# Altium PCB dtb219-schematic.PcbDoc
Units mil, origin at the board's own origin, x right, y up, seen from the top; angles counter-clockwise.
Board outline 8000 x 1250 mil, 2 copper layers (Top Layer, Bottom Layer); 41 components, 14 nets, 107 pads, 1 vias.
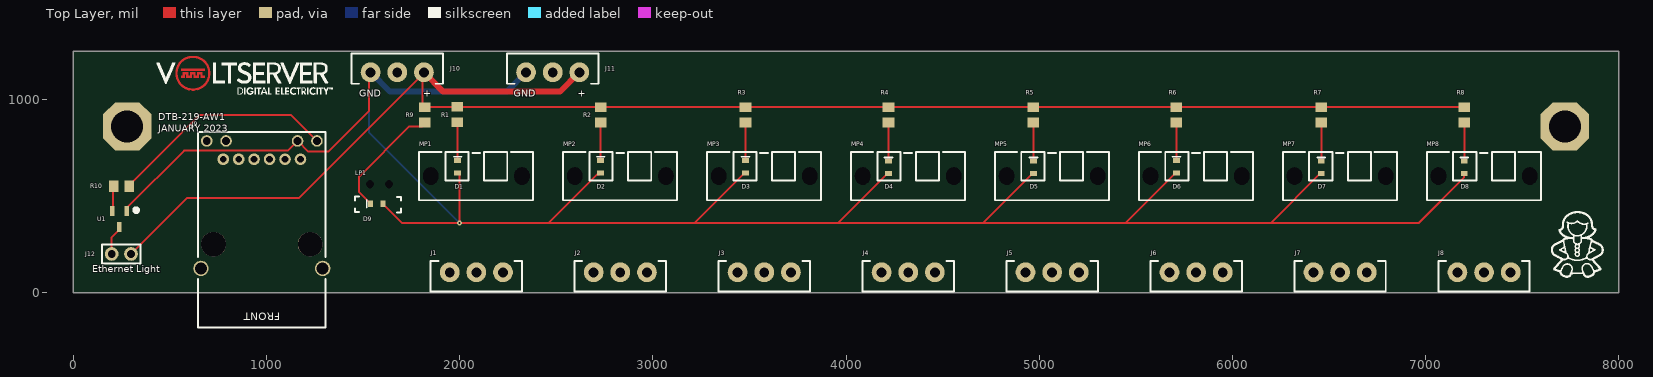
[diagram p0: Top Layer view]
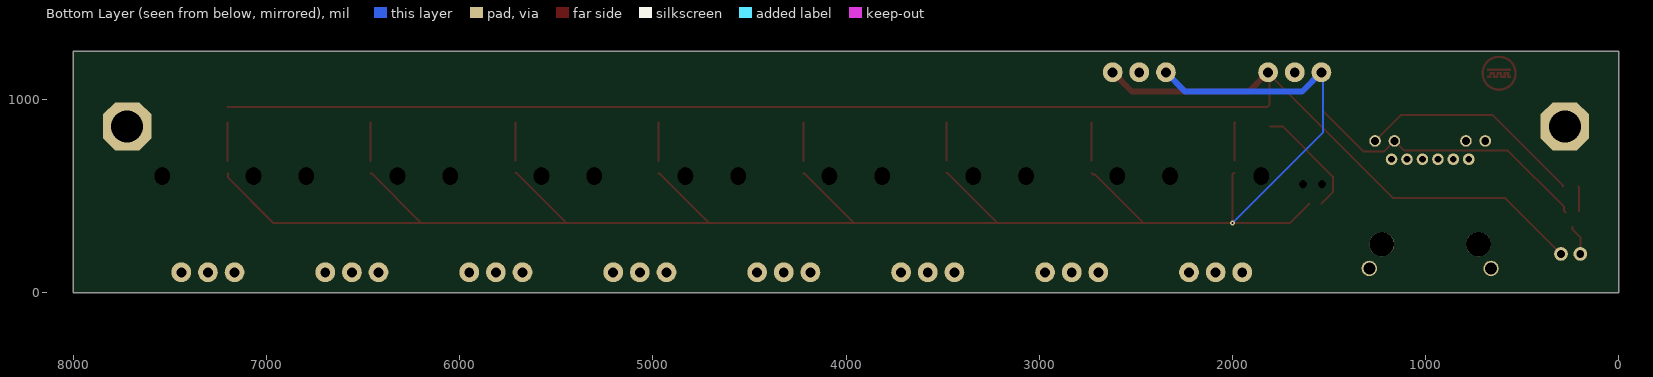
[diagram p1: Bottom Layer view, seen from below]
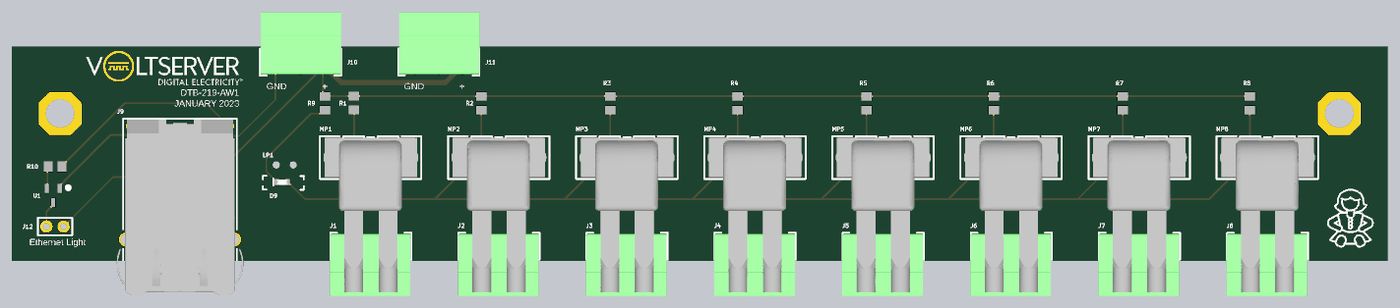
[diagram p2: 3D render of the assembled board from above, using the file's embedded part models]

## Layer stack, top to bottom
Top Solder: solder mask 0.4, Solder Resist, Dk 3.5
Top Layer: signal copper 1.4
Dielectric 1: dielectric 12.6, FR-4, Dk 4.8
Bottom Layer: signal copper 1.4
Bottom Solder: solder mask 0.4, Solder Resist, Dk 3.5

## Board outline
0,0 0,1250 8000,1250 8000,0

## Design rules (kind name [scope] priority, off if disabled: settings)
Clearance [All] p1: gap=10 ignorepadtopadclearanceinfootprint=FALSE except(0: Arc-Hole Track-Hole SMDPad-Hole THPad-Hole Via-Hole Fill-Hole Poly-Hole Region-Hole Text-Hole)
PolygonConnect [All] p1: connectstyle=Relief reliefconductorwidth=10 reliefentries=4 polygonreliefangle="90 Angle" airgapwidth=10
RoutingVias [All] p1: holewidth=10 width=25 viastyle="Through Hole" minholewidth=10 minwidth=25 maxholewidth=10 maxwidth=25
SolderMaskExpansion [All] p1: expansion=4 istentingtop=FALSE
Width [All] p1: maxlimit=30 minlimit=10 preferedwidth=10
30 further rules are at their usual default settings.

## Components (designator, comment, footprint, x,y, rotation, side; value= is the part's Value field where it differs from the comment)
D1 "Green LED Clear SMD" LTST-C19X 1990,683 r0 top value="Green LED"
D2 "Green LED Clear SMD" LTST-C19X 2730,683 r0 top value="Green LED"
D3 "Green LED Clear SMD" LTST-C19X 3480,683 r0 top value="Green LED"
D4 "Green LED Clear SMD" LTST-C19X 4220,680 r0 top value="Green LED"
D5 "Green LED Clear SMD" LTST-C19X 4970,680 r0 top value="Green LED"
D6 "Green LED Clear SMD" LTST-C19X 5710,683 r0 top value="Green LED"
D7 "Green LED Clear SMD" LTST-C19X 6460,680 r0 top value="Green LED"
D8 "Green LED Clear SMD" LTST-C19X 7200,680 r0 top value="Green LED"
D9 "Green LED Clear SMD" LTST-C19X 1540,460 r90 top value="Green LED"
J1 "1844223" 1844223 2087,105 r0 top locked
J2 "1844223" 1844223 2832,105 r0 top locked
J3 "1844223" 1844223 3577,105 r0 top locked
J4 "1844223" 1844223 4322,105 r0 top locked
J5 "1844223" 1844223 5067,105 r0 top locked
J6 "1844223" 1844223 5812,105 r0 top locked
J7 "1844223" 1844223 6557,105 r0 top locked
J8 "1844223" 1844223 7302,105 r0 top locked
J9 "08B0-1D1T-06-F" 08B0-1D1T-06-F 977,455 r180 top locked
J10 "1844223" 1844223 1677.8,1140 r180 top
J11 "1844223" 1844223 2482.2,1140 r180 top
J12 "PRPC002SAAN-RC" PRPC002SAAN-RC 200,200 r0 top
LP1 "LPF-C011302S" LPF-C011302S 1537,560 r270 top locked
MP1 "RLP2-400-800" RLP2-400-800 2087,603 r0 top locked
MP2 "RLP2-400-800" RLP2-400-800 2832,603 r0 top locked
MP3 "RLP2-400-800" RLP2-400-800 3577,603 r0 top locked
MP4 "RLP2-400-800" RLP2-400-800 4322,603 r0 top locked
MP5 "RLP2-400-800" RLP2-400-800 5067,603 r0 top locked
MP6 "RLP2-400-800" RLP2-400-800 5812,603 r0 top locked
MP7 "RLP2-400-800" RLP2-400-800 6557,603 r0 top
MP8 "RLP2-400-800" RLP2-400-800 7302,603 r0 top locked
R1 "150 OHM" "0805 Footprint" 1988,921 r270 top value="150 Ohm 5%, 1/2W"
R2 "150 OHM" "0805 Footprint" 2730,920 r270 top value="150 Ohm 5%, 1/2W"
R3 "150 OHM" "0805 Footprint" 3480,920 r270 top value="150 Ohm 5%, 1/2W"
R4 "150 OHM" "0805 Footprint" 4220,920 r270 top value="150 Ohm 5%, 1/2W"
R5 "150 OHM" "0805 Footprint" 4970,920 r270 top value="150 Ohm 5%, 1/2W"
R6 "150 OHM" "0805 Footprint" 5710,920 r270 top value="150 Ohm 5%, 1/2W"
R7 "150 OHM" "0805 Footprint" 6460,920 r270 top value="150 Ohm 5%, 1/2W"
R8 "150 OHM" "0805 Footprint" 7200,920 r270 top value="150 Ohm 5%, 1/2W"
R9 "150 OHM" "0805 Footprint" 1820,920 r270 top value="150 Ohm 5%, 1/2W"
R10 "RES SMD 110 OHM 5% 1/8w 0805" "0805 Footprint" 250,550 r0 top value="110 Ohm 5%, 1/8W"
U1 "LINEAR 2.2V 200MA" SOT23-3 277.4,422.68 r270 top

## Footprints (in the part's own frame and the unit in brackets; to place one, negate y for a bottom-side part, rotate by r counter-clockwise, add the part's x,y. Pads: shape width x height; smd on the part's side, far side on the other; paste and mask are expansions set on the pad)
08B0-1D1T-06-F [mil] "507-1441-ND"
  round 128 hole 128 unplated: 0(-250,205) 0(250,205)
  round 60 hole 35: 1(-200,-235) 2(-120,-235) 3(-40,-235) 4(40,-235) 5(120,-235) 6(200,-235)
  round 60 hole 40: 7(-285,-330) 8(-185,-330) 9(185,-330) 10(285,-330)
  round 80 hole 62: 11(-315,330) 12(315,330)
  silkscreen extent -330,-375 330,635, body extent -369,-370 369,660, height 578
"0805 Footprint" [mil]
  rect 50x60 smd: 1(-40,0) 2(40,0)
  body extent -40,-25 40,25, height 22
1844223 [mm]
  round 2.6 hole 1.3: 1(-3.5,0) 2(0,0) 3(3.5,0)
  silkscreen extent -6,-2.5 6,1.5, body extent -6.05,-7.9 5.85,1.3, height 7.25
LPF-C011302S [mil]
  round 0 hole 43 unplated: 0(0,98.43) 0(0,0)
  silkscreen extent 64,-77 145,160
LTST-C19X [mil]
  rect 35x26 smd: 1(0,0) 2(0,-63)
  silkscreen extent -20,20 20,20, body extent -16,-63 16,0, height 22
PRPC002SAAN-RC [mm]
  round 1.8 hole 1: 1(0,0) 2(2.54,0)
  silkscreen extent -1.27,-1.27 3.81,1.27
RLP2-400-800 [mil] "Light Pipe 2 Wide Clear Rigid Round with Flat Top, 2.8mm Board Mount, Snap-In, Right Angle"
  round 0 hole 79 slot 90 at 90 deg unplated: 0(-236,0) 0(236,0)
  silkscreen extent -296,-125 294,125, body extent -289,-787 289,115, height 486
SOT23-3 [mm]
  rect 1.3x0.6 smd: 1(0,0) 2(0,-1.9) 3(2.1,-0.95)
  silkscreen extent -0.35,1 0.15,1.5, body extent 0.35,-2.45 1.75,0.55, height 1.12

## Part data
D1 D2 D3 D4 D5 D6 D7 D8 D9: library part "LED Green", "Green 571nm LED Indication - Discrete 2V 0603 (1608 Metric)", Manufacturer="Lite-On Inc.", Manufacturer PN=LTST-C191KGKT, Vendor=Digikey, Vendor PN=160-1446-2-ND
J1 J2 J3 J4 J5 J6 J7 J8 J10 J11: "3 Position Terminal Block Header, Male Pins, Shrouded (4 Side) 0.138\" (3.50mm) 90°, Right Angle Through Hole", Manufacturer="Phoenix Contact", VoltServer PN=CON-00009, Manufacturer PN=1844223, Vendor=Digikey, Vendor PN=277-2415-ND
J9: "CONN MAGJACK 1PORT 100 BASE-T", Manufacturer="Bel Fuse Inc", Manufacturer PN=08B0-1D1T-06-F, Vendor=Digikey, Vendor PN=507-1441-ND
J12: "CONN HEADER .100\" SNGL STR 2POS", Manufacturer="Sullins Connector Solutions", VoltServer PN=CON-00043, Manufacturer PN=PRPC002SAAN-RC, Vendor=Digikey, Vendor PN=S1011EC-02-ND
LP1: "Light Pipe Single Clear Rigid Round with Flat Top, 3mm Board Mount, Press Fit, Right Angle", Manufacturer="Lumex Opto/Components Inc.", VoltServer PN=LPG-00002, Manufacturer PN=LPF-C011302S, Vendor=Digikey, Vendor PN=67-1846-ND
MP1 MP2 MP3 MP4 MP5 MP6 MP7 MP8: "Light Pipe 2 Wide Clear Rigid Round with Flat Top, 2.8mm Board Mount, Snap-In, Right Angle", Manufacturer=Bivar, Manufacturer PN=RLP2-400-800, Vendor=Digikey, Vendor PN=492-1448-ND
R1 R2 R3 R4 R5 R6 R7 R8 R9: library part ERJ-P06J151V, "150 Ohms ±5% 0.5W, 1/2W Chip Resistor 0805 (2012 Metric)", Manufacturer="Panasonic Electionic Components", Manufacturer PN=ERJ-P06J151V, Vendor=Digi-Key, Vendor PN=P150ADTR-ND
R10: library part ERJ-6GEYJ111V, "110 Ohms ±5% 0.125W, 1/8W Chip Resistor 0805 (2012 Metric) Automotive AEC-Q200 Thick Film", Manufacturer="Panasonic Electionic Components", Manufacturer PN=ERJ-6GEYJ111V, Vendor=Digi-Key, Vendor PN=P110ATR-ND
U1: library part TPS7A0522PDBZR, "Linear Voltage Regulator IC Positive Fixed 1 Output 200mA SOT-23-3", Manufacturer="Texas Instruments", Manufacturer PN=TPS7A0522PDBZR, Vendor=Digi-Key, Vendor PN=296-TPS7A0522PDBZRTR-ND

## Free pads (board coordinates)
  oct 250x250 hole 166: ""(280,860) ""(7720,860)

## Via types
v1: diameter 25, hole 10, Top Layer to Bottom Layer, 1 vias

## Nets (pads, with @x,y where several pads share a name; then routed paths per layer and width w, separated by ;. In a path a pad name is that pad's centre, name@x,y a point inside that pad or via, vN(x,y) a via of type N, cw(c..) or ccw(c..) an arc to the next point about the centre after c; other vN are vias at no path point)
5V: J10.1 J11.1 J12.2 R1.1 R2.1 R3.1 R4.1 R5.1 R6.1 R7.1 R8.1 R9.1 | length 8333
  Top Layer w10: J12.2 589.12,489.12 1169.12,489.12 1807.8,1127.8 1807.8,972.2 R9.1 1821,961 R1.1 7199,961 R8.1
  Top Layer w30: J10.1 1915.59,1040 2520,1040 J11.1
GND: D1.2 D2.2 D3.2 D4.2 D5.2 D6.2 D7.2 D8.2 D9.2 J9.8 J10.3 J11.3 U1.1 | length 11835
  Top Layer w10: U1.1@276.93,415.4 284.21,422.68 284.21,444.21 575,735 1112,735 J9.8 1217,730 1320,730 1532.2,942.2 J10.3@1532.2,1140 ; D9.2 1703,360 v1(2000,360) ; D1.2 1992,620 2000,612 v1(2000,360) ; D2.2 2722,612 2712,612 2460,360 ; D3.2 3475.5,620 3220,364.5 3220,360 ; D4.2 4215.5,617 3960,361.5 3960,360 ; D5.2 4965.5,617 4708.5,360 ; D6.2 5705.5,620 5445.5,360 ; D7.2 6455.5,617 6200,361.5 6200,360 ; D8.2 7197.56,614.56 7197.56,594.86 6962.71,360 6200,360 ; v1(2000,360) 2460,360 ; 2460,360 3220,360 ; 3220,360 3960,360 ; 3960,360 4708.5,360 ; 4708.5,360 5445.5,360 ; 5445.5,360 6200,360
  Bottom Layer w10: J10.3@1532.2,1140 1532.2,827.8 v1(2000,360)
  Bottom Layer w30: J10.3 1640,1040 2244.41,1040 J11.3
NetD1_1: D1.1 R1.2 | length 198.8
  Top Layer w10: R1.2 1990,879 D1.1
NetD2_1: D2.1 R2.2 | length 197
  Top Layer w10: D2.1 R2.2
NetD3_1: D3.1 R3.2 | length 197
  Top Layer w10: D3.1 R3.2
NetD4_1: D4.1 R4.2 | length 200
  Top Layer w10: D4.1 R4.2
NetD5_1: D5.1 R5.2 | length 200
  Top Layer w10: D5.1 R5.2
NetD6_1: D6.1 R6.2 | length 197
  Top Layer w10: D6.1 R6.2
NetD7_1: D7.1 R7.2 | length 200
  Top Layer w10: D7.1 R7.2
NetD8_1: D8.1 R8.2 | length 200
  Top Layer w10: D8.1 R8.2
NetD9_1: D9.1 R9.2 | length 597.5
  Top Layer w10: D9.1 1480,520 1480,600 1740,860 R9.2@1805,860
NetJ9_7: J9.7 R10.2 | length 1184.1
  Top Layer w10: R10.2 290,555 655,920 1127,920 J9.7
NetJ12_1: J12.1 U1.3 | length 156.6
  Top Layer w10: J12.1 200,286.22 240,326.22 U1.3
NetR10_1: R10.1 U1.2 | length 128.8
  Top Layer w10: U1.2@206.42,422.68 206.42,546.42 R10.1
pads on no net: J1.1 J1.2 J1.3 J2.1 J2.2 J2.3 J3.1 J3.2 J3.3 J4.1 J4.2 J4.3 J5.1 J5.2 J5.3 J6.1 J6.2 J6.3 J7.1 J7.2 J7.3 J8.1 J8.2 J8.3 J9.0 J9.1 J9.2 J9.3 J9.4 J9.5 J9.6 J9.9 J9.10 J9.11 J9.12 J10.2 J11.2 LP1.0 MP1.0 MP2.0 MP3.0 MP4.0 MP5.0 MP6.0 MP7.0 MP8.0

## Other copper
Top Layer:
  region: 631 vertices and 1 holes, not listed, extent 530.81,1045.8 709.32,1224.32
  region: 596.68,1112.33 586.8,1112.33 586.8,1130.78 577.58,1130.78 577.58,1112.33 559.79,1112.33 559.79,1120.9 560.45,1120.9 560.45,1121.56 568.35,1121.56 568.35,1140 596.02,1140 596.02,1121.56 605.24,1121.56 605.24,1139.34 605.9,1139.34 605.9,1140 632.91,1140 632.91,1121.56 642.79,1121.56 642.79,1122.21 642.13,1122.21 642.13,1122.87 642.79,1122.87 642.79,1138.02 642.13,1138.02 642.13,1139.34 642.79,1139.34 642.79,1140 669.8,1140 669.8,1121.56 680.34,1121.56 680.34,1112.33 661.23,1112.33 661.23,1130.78 651.35,1130.78 651.35,1112.33 623.69,1112.33 623.69,1130.78 614.46,1130.78 614.46,1112.33 597.34,1112.33
  region: 673.09,1158.44 680.34,1158.44 680.34,1149.22 559.79,1149.22 559.79,1158.44 672.43,1158.44

## Silkscreen, mask and mechanical layers (free items; w line width, h text height)
Top Overlay:
  drawing of 30 lines, arcs and shapes, not listed
  text "GND              +" at 1480,1000.67 h60
  text "GND              +" at 2280,1000.67 h60
  text "DTB-219-AW1 / JANUARY 2023" at 440.1,820.03 h60
  text "Ethernet Light" at 100,91.27 h60
Top Solder:
  drawing of 3 lines, arcs and shapes, not listed
Mechanical 1:
  the board outline again, w10

## Dimensions
0,0 to 8000,0 on Mechanical 1

## Text inside footprints (layer, text, board x,y; h text height)
J9: Top Overlay "FRONT" at 1072,-105 h40 r180